# Altium PCB TK106_MIDI.PcbDoc
Units mm, origin at the board's own origin, x right, y up, seen from the top; angles counter-clockwise.
Board outline 60 x 100 mm, 2 copper layers (Top Layer, Bottom Layer); 18 components, 17 nets, 366 pads, 0 vias.
Unrouted connection lines stored in the file: 59.
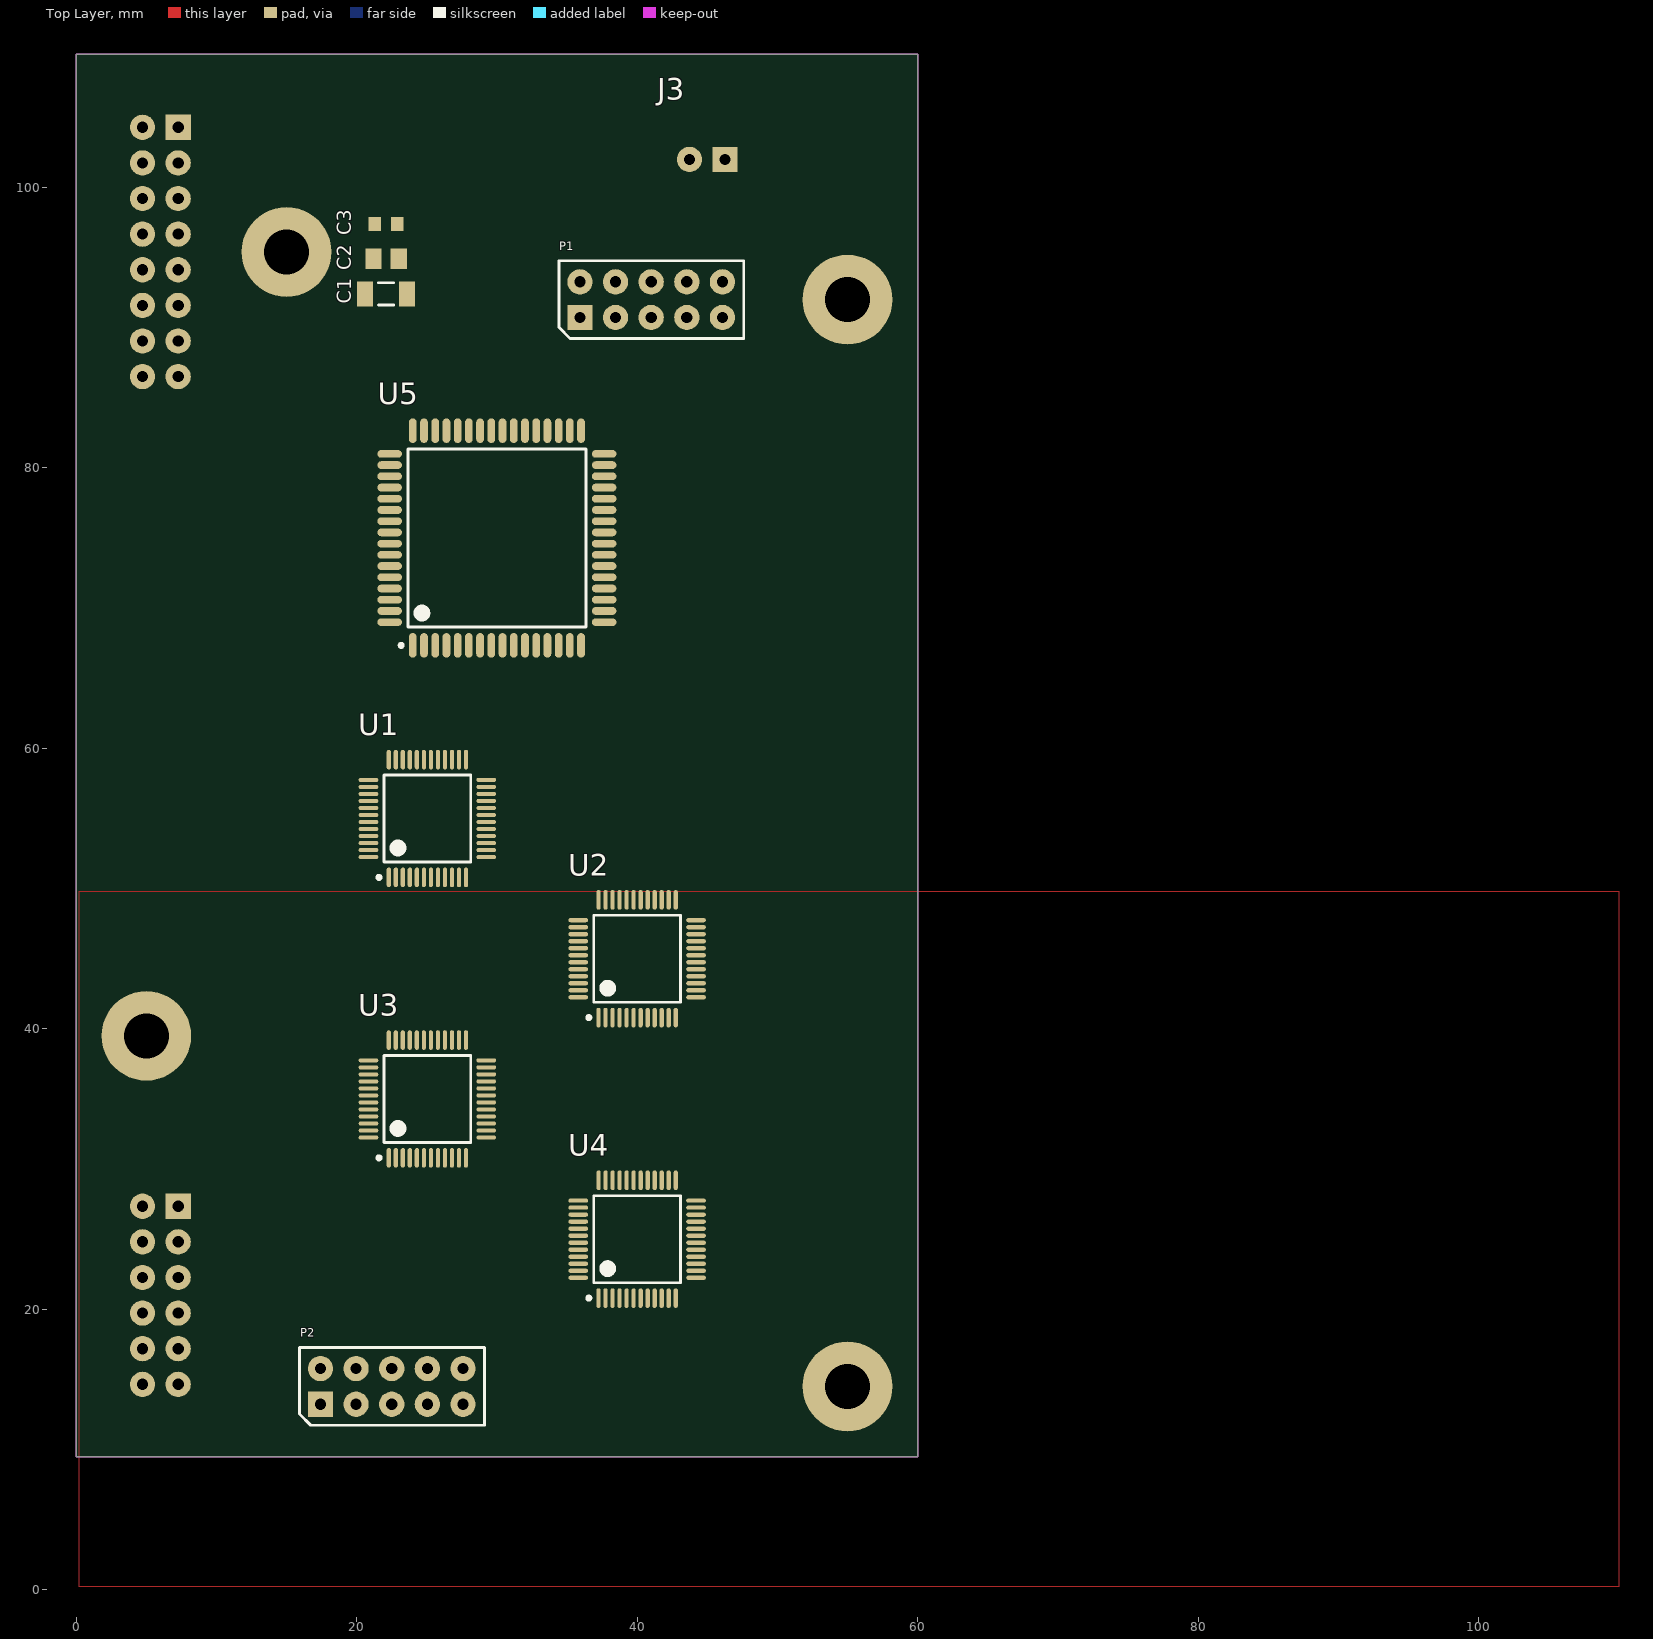
[diagram p0: Top Layer view]
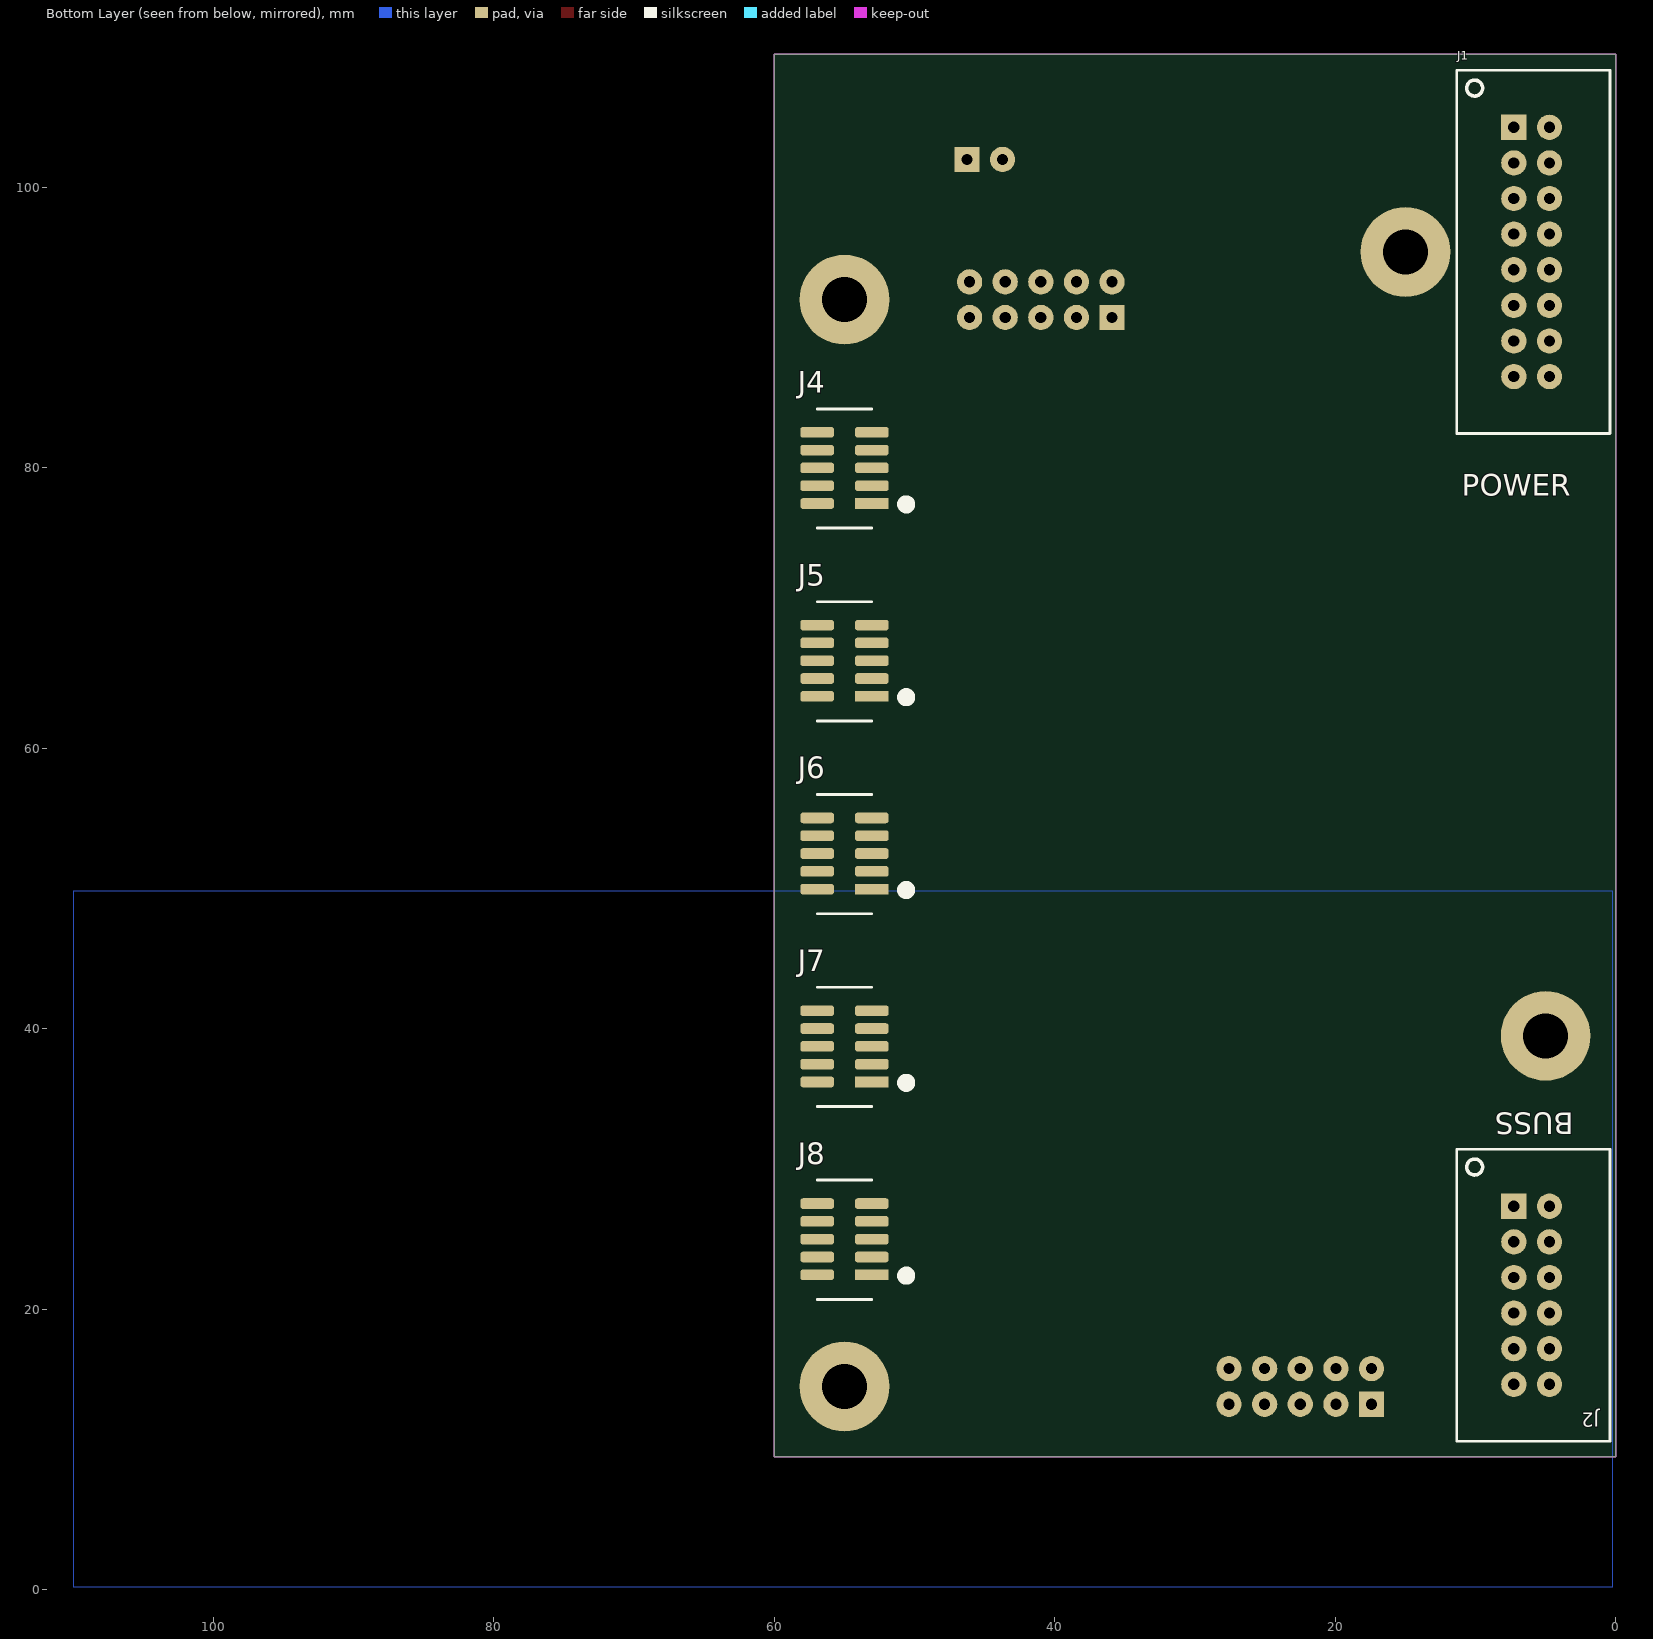
[diagram p1: Bottom Layer view, seen from below]

## Layer stack, top to bottom
Top Solder: solder mask 0.0102, Solder Resist, Dk 3.5
Top Layer: signal copper 0.0356
Dielectric 1: dielectric 0.32, FR-4, Dk 4.8
Bottom Layer: signal copper 0.0356
Bottom Solder: solder mask 0.0102, Solder Resist, Dk 3.5

## Board outline
0,9.5 0,109.5 60,109.5 60,9.5

## Design rules (kind name [scope] priority, off if disabled: settings)
Clearance [All] p1: gap=0.16 ignorepadtopadclearanceinfootprint=FALSE except(0: Arc-Text Arc-Hole Track-Text Track-Hole SMDPad-Text SMDPad-Hole THPad-Text THPad-Hole Via-Text Via-Hole Fill-Text Fill-Hole Poly-Text Poly-Hole Region-Text Region-Hole Text-Text Text-Hole)
Height [All] p1: minheight=0 maxheight=200 prefheight=12.7
HoleSize [All] p1: absolutevalues=TRUE maxlimit=6.35 minlimit=0.3 maxpercent=80.000 minpercent=20.000
MinimumSolderMaskSliver [All] p1: minsoldermaskwidth=0.1
PlaneClearance [All] p1: clearance=1
PlaneConnect [All] p1: planeconnectstyle=Relief reliefexpansion=0.508 reliefentries=4 reliefconductorwidth=1 reliefairgap=0.254
PolygonConnect PolygonConnect_1 [IsVia] p1: connectstyle=Direct reliefconductorwidth=0.254 reliefentries=4 polygonreliefangle="90 Angle" airgapwidth=0.254
PolygonConnect [All] p2: connectstyle=Relief reliefconductorwidth=0.2 reliefentries=4 polygonreliefangle="90 Angle" airgapwidth=0.2
RoutingVias [All] p1: holewidth=0.3 width=0.6 viastyle="Through Hole" minholewidth=0.3 minwidth=0.6 maxholewidth=6.35 maxwidth=10
SilkToSolderMaskClearance [IsPad] p1: minsilkscreentomaskgap=0.178 clearancetoexposedcopper=TRUE
SolderMaskExpansion [All] p1: expansion=0.1
Width [All] p1: maxlimit=10 minlimit=0.16 preferedwidth=0.4
24 further rules are at their usual default settings.

## Components (designator, comment, footprint, x,y, rotation, side; value= is the part's Value field where it differs from the comment)
C1 "4.7uF" CAPC1206(3216)170_N 22.1,92.407 r180 top
C2 "1uF" CAPC0805(2012)100_N 22.1,94.907 r180 top
C3 "100nF" CAPC0603(1608)55_N 22.1,97.407 r180 top
J1 "Header2x8" HDRV16W64P254_2X8_Shrouded 6,95.4 r180 bottom
J2 "Header2x6" HDRV12W64P254_2X6_Shrouded 6,21 r180 bottom
J3 "B2B-XH-A (LF)(SN)" JST_2P 45,102 r90 top
J4 "2x5_header_1,27mm" SMDHDRV10P127_2X5_615X330X560B 55,80 r0 bottom
J5 "2x5_header_1,27mm" SMDHDRV10P127_2X5_615X330X560B 55,66.25 r0 bottom
J6 "2x5_header_1,27mm" SMDHDRV10P127_2X5_615X330X560B 55,52.5 r0 bottom
J7 "2x5_header_1,27mm" SMDHDRV10P127_2X5_615X330X560B 55,38.75 r0 bottom
J8 "2x5_header_1,27mm" SMDHDRV10P127_2X5_615X330X560B 55,25 r0 bottom
P1 "Header2x5" HDRV10W64P254_2X5_Female 41,92 r90 top
P2 "Header2x5" HDRV10W64P254_2X5_Female 22.5,14.5 r90 top
U1 "ATmega4809" TQFP50P900X900X120-48N 25.04,55 r90 top
U2 "ATmega4809" TQFP50P900X900X120-48N 40,45 r90 top
U3 "ATmega4809" TQFP50P900X900X120-48N 25.04,35 r90 top
U4 "ATmega4809" TQFP50P900X900X120-48N 40,25 r90 top
U5 "ATXMEGA64A3U-AU" TQFP64 30,75 r90 top

## Footprints (in the part's own frame and the unit in brackets; to place one, negate y for a bottom-side part, rotate by r counter-clockwise, add the part's x,y. Pads: shape width x height; smd on the part's side, far side on the other; paste and mask are expansions set on the pad)
CAPC0603(1608)55_N [mm] "Chip Capacitor, Body 1.6x0.8mm, Height 0.55mm, IPC Medium Density"
  rect 0.9x1 smd: 1(-0.8,0) 2(0.8,0)
  body extent -0.87,-0.48 0.88,0.47, height 0.55
CAPC0805(2012)100_N [mm] "Chip Capacitor, Body 2.0x1.2mm, Height 1.0mm, IPC Medium Density"
  rect 1.15x1.45 smd: 1(-0.9,0) 2(0.9,0)
  body extent -1.1,-0.72 1.1,0.73, height 1
CAPC1206(3216)170_N [mm] "Chip Capacitor, Body 3.2x1.6mm, Height 1.7mm, IPC Medium Density"
  rect 1.15x1.8 smd: 1(-1.5,0) 2(1.5,0)
  silkscreen extent -0.55,-0.8 0.55,0.8, body extent -1.7,-0.9 1.7,0.9, height 1.7
HDRV10W64P254_2X5_Female [mm] "Header 2x5 Female"
  rect 1.8x1.8 hole 0.8: 1(-1.27,5.08)
  round 1.8 hole 0.8: 2(1.27,5.08) 3(-1.27,2.54) 4(1.27,2.54) 5(-1.27,0) 6(1.27,0) 7(-1.27,-2.54) 8(1.27,-2.54) 9(-1.27,-5.08) 10(1.27,-5.08)
  silkscreen extent -2.77,-6.6 2.77,6.58, body extent -2.48,-6.6 2.48,6.6, height 8.51
HDRV12W64P254_2X6_Shrouded [mm] "Header 2x6 Shrouded"
  rect 1.8x1.8 hole 0.8: 1(-1.27,6.35)
  round 1.8 hole 0.8: 2(1.27,6.35) 3(-1.27,3.81) 4(1.27,3.81) 5(-1.27,1.27) 6(1.27,1.27) 7(-1.27,-1.27) 8(1.27,-1.27) 9(-1.27,-3.81) 10(1.27,-3.81) 11(-1.27,-6.35) 12(1.27,-6.35)
  silkscreen extent -5.33,-10.41 5.59,10.41, body extent -4.45,-9.53 4.83,9.52, height 8.89
HDRV16W64P254_2X8_Shrouded [mm] "Header 2x8 Shrouded"
  rect 1.8x1.8 hole 0.8: 1(-1.27,8.89)
  round 1.8 hole 0.8: 2(1.27,8.89) 3(-1.27,6.35) 4(1.27,6.35) 5(-1.27,3.81) 6(1.27,3.81) 7(-1.27,1.27) 8(1.27,1.27) 9(-1.27,-1.27) 10(1.27,-1.27) 11(-1.27,-3.81) 12(1.27,-3.81) 13(-1.27,-6.35) 14(1.27,-6.35) 15(-1.27,-8.89) 16(1.27,-8.89)
  silkscreen extent -5.33,-12.95 5.59,12.95, body extent -4.45,-12.07 4.83,12.06, height 8.89
JST_2P [mm]
  rect 1.8x1.8 hole 0.8: 1(0,-1.27)
  round 1.8 hole 0.8: 2(0,1.27)
  body extent -2.4,-3.7 3.35,3.7, height 7
SMDHDRV10P127_2X5_615X330X560B [mm] "SMD 2X5 Vertical Header"
  rect 2.4x0.76 smd: 1(-1.95,2.54)
  rrect50% 2.4x0.76 smd: 2(1.95,2.54) 3(-1.95,1.27) 4(1.95,1.27) 5(-1.95,0) 6(1.95,0) 7(-1.95,-1.27) 8(1.95,-1.27) 9(-1.95,-2.54) 10(1.95,-2.54)
  silkscreen extent -4.54,-4.21 1.95,4.29, body extent -2.7,-3.18 2.8,3.17, height 4.5
TQFP50P900X900X120-48N [mm] "TSQFP, 48-Leads, Body 7,00x7,00mm, Pitch 0,50mm, IPC Medium Density"
  oval 1.4x0.3 smd: 1(-4.2,2.75) 2(-4.2,2.25) 3(-4.2,1.75) 4(-4.2,1.25) 5(-4.2,0.75) 6(-4.2,0.25) 7(-4.2,-0.25) 8(-4.2,-0.75) 9(-4.2,-1.25) 10(-4.2,-1.75) 11(-4.2,-2.25) 12(-4.2,-2.75) 25(4.2,-2.75) 26(4.2,-2.25) 27(4.2,-1.75) 28(4.2,-1.25) 29(4.2,-0.75) 30(4.2,-0.25) 31(4.2,0.25) 32(4.2,0.75) 33(4.2,1.25) 34(4.2,1.75) 35(4.2,2.25) 36(4.2,2.75)
  oval 0.3x1.4 smd: 13(-2.75,-4.2) 14(-2.25,-4.2) 15(-1.75,-4.2) 16(-1.25,-4.2) 17(-0.75,-4.2) 18(-0.25,-4.2) 19(0.25,-4.2) 20(0.75,-4.2) 21(1.25,-4.2) 22(1.75,-4.2) 23(2.25,-4.2) 24(2.75,-4.2) 37(2.75,4.2) 38(2.25,4.2) 39(1.75,4.2) 40(1.25,4.2) 41(0.75,4.2) 42(0.25,4.2) 43(-0.25,4.2) 44(-0.75,4.2) 45(-1.25,4.2) 46(-1.75,4.2) 47(-2.25,4.2) 48(-2.75,4.2)
  silkscreen extent -4.32,-3.1 3.1,3.57, body extent -4.51,-4.51 4.51,4.51, height 1.1
TQFP64 [mm] "Thin QFP, 64-Leads, Body 14x14mm, Pitch 0.8mm, IPC Medium Density"
  oval 1.75x0.55 smd: 1(-7.65,6) 2(-7.65,5.2) 3(-7.65,4.4) 4(-7.65,3.6) 5(-7.65,2.8) 6(-7.65,2) 7(-7.65,1.2) 8(-7.65,0.4) 9(-7.65,-0.4) 10(-7.65,-1.2) 11(-7.65,-2) 12(-7.65,-2.8) 13(-7.65,-3.6) 14(-7.65,-4.4) 15(-7.65,-5.2) 16(-7.65,-6) 33(7.65,-6) 34(7.65,-5.2) 35(7.65,-4.4) 36(7.65,-3.6) 37(7.65,-2.8) 38(7.65,-2) 39(7.65,-1.2) 40(7.65,-0.4) 41(7.65,0.4) 42(7.65,1.2) 43(7.65,2) 44(7.65,2.8) 45(7.65,3.6) 46(7.65,4.4) 47(7.65,5.2) 48(7.65,6)
  oval 0.55x1.75 smd: 17(-6,-7.65) 18(-5.2,-7.65) 19(-4.4,-7.65) 20(-3.6,-7.65) 21(-2.8,-7.65) 22(-2,-7.65) 23(-1.2,-7.65) 24(-0.4,-7.65) 25(0.4,-7.65) 26(1.2,-7.65) 27(2,-7.65) 28(2.8,-7.65) 29(3.6,-7.65) 30(4.4,-7.65) 31(5.2,-7.65) 32(6,-7.65) 49(6,7.65) 50(5.2,7.65) 51(4.4,7.65) 52(3.6,7.65) 53(2.8,7.65) 54(2,7.65) 55(1.2,7.65) 56(0.4,7.65) 57(-0.4,7.65) 58(-1.2,7.65) 59(-2,7.65) 60(-2.8,7.65) 61(-3.6,7.65) 62(-4.4,7.65) 63(-5.2,7.65) 64(-6,7.65)
  silkscreen extent -7.77,-6.35 6.35,6.95, body extent -7,-7 7,7, height 1.6

## Part data
C1: library part 2992, "X7R 50V", id=2992, navn=4.7uF, nokkelord="Kondensator, capacitor", pakke_opprettet="11.02.2015 13.21.22", pakke_opprettet_av=815, pakketype=1206, pris=1, produsent=Multikomp, symbol_opprettet="14.11.2014 20.19.34", symbol_opprettet_av=815
C2: library part 3582, "X7R 50V 10%", id=3582, leverandor=Farnell, leverandor_varenr=1735541, navn=1uF, nokkelord="Kondensator, capacitor", pakke_opprettet="14.11.2014 20.52.01", pakke_opprettet_av=815, pakketype=0805, pris=4, produsent=Murata, symbol_opprettet="14.11.2014 20.19.34", symbol_opprettet_av=815
C3: library part 3028, "X7R 50V 5%", id=3028, leverandor=Farnell, leverandor_varenr=1759122, navn=100nF, nokkelord="Kondensator, Capacitor, CAP", pakke_opprettet="18.02.2015 14.18.13", pakke_opprettet_av=815, pakketype=0603, pris=1, produsent=Multikomp, symbol_opprettet="14.11.2014 20.19.34", symbol_opprettet_av=815
J1: library part 4645, beskrivelse=Header, id=4645, navn="Header Shrouded 2X8P", nokkelord=Header, pakke_opprettet="2019-02-14 23:39:48", pakke_opprettet_av=815, pakketype=TH, pris=10, symbol_opprettet="2014-11-13 11:08:32", symbol_opprettet_av=815
J2: library part 4622, beskrivelse="Header Shrouded", id=4622, komponenttype=11, navn="Header 2X6 Shrouded", nokkelord=Header, pakke_opprettet="16/02/2019 14:00:24", pakke_opprettet_av=815, pakketype=TH, pris=16, symbol_opprettet="13/11/2014 11:04:02", symbol_opprettet_av=815
J3: library part 2227, antall=206, beskrivelse="JST 2pin (pris pr. stk.)", dybde=2, hylle=0, id=2227, kolonne=0, lager_type=Baklager, leverandor=Farnell, leverandor_varenr=1516276, navn="B2B-XH-A (LF)(SN)", nokkelord="Connector, Kontakt", pakke_opprettet="28.06.2014 18:25:03", pakke_opprettet_av=815, pakketype=TH, pris=2, produsent=JST, rad=1, rom=GM, symbol_opprettet="28.06.2014 15:33:17", symbol_opprettet_av=815
J4 J5 J6 J7 J8: library part 2449, antall=55, beskrivelse="1,27mm Pitch SMD Header", dybde=0, hylle=6, id=2449, kolonne=0, lager_type=Fremlager, navn="Header SMD 127 2x5", nokkelord=JTAG, pakke_opprettet="15.11.2014 18:30:38", pakke_opprettet_av=815, pakketype=SMD, pris=20, rad=4, rom=OV, symbol_opprettet="11.03.2019 22:06:02", symbol_opprettet_av=1366
P1 P2: library part 5661, beskrivelse=Header, id=5661, komponenttype=11, navn="Header 2X5 Female", nokkelord=Header, pakke_opprettet="31/01/2020 22:57:35", pakke_opprettet_av=815, pakketype=TH, pris=5, symbol_opprettet="13/11/2014 11:03:55", symbol_opprettet_av=815
U1 U2 U3 U4: library part 4733, beskrivelse="8-bit mikrokontroller", id=4733, navn=ATmega4809, nokkelord="AVR, atmel, microchip", pakke_opprettet="24.06.2019 20:42:06", pakke_opprettet_av=815, pakketype=TQFP, pris=0, produsent=Atmel, symbol_opprettet="24.06.2019 21:16:45", symbol_opprettet_av=815
U5: library part 2105, antall=900, beskrivelse=Mikrokontroller, dybde=1, hylle=0, id=2105, kolonne=0, lager_type=Baklager, navn=ATXMEGA64A3U-AU, pakke_opprettet="13.07.2014 19:45:53", pakke_opprettet_av=815, pakketype=TQFP, pris=0, produsent=Atmel, rad=44, rom=GM, symbol_opprettet="07.05.2015 23:14:48", symbol_opprettet_av=815

## Free pads (board coordinates)
  round 6.4 hole 3.2 unplated: 0(5,39.5) 0(15,95.4) 0(55,14.5) 0(55,92)

## Nets (pads, with @x,y where several pads share a name; then routed paths per layer and width w, separated by ;. In a path a pad name is that pad's centre, name@x,y a point inside that pad or via, vN(x,y) a via of type N, cw(c..) or ccw(c..) an arc to the next point about the centre after c; other vN are vias at no path point)
GND: C1.1 C2.1 C3.1 J1.9 J1.10 J1.11 J1.12 J1.13 J1.14 J2.1 J2.12 J5.2 J6.2 J7.2 J8.2 P1.7 P1.9 P2.9 pad.0@15,95.4 U1.15 U1.29 U1.43 U2.15 U2.29 U2.43 U3.15 U3.29 U3.43 U4.15 U4.29 U4.43
IN_0: J2.11
MIDI_CH1: J2.3
MIDI_CH2: J2.5
MIDI_CH3: J2.7
MIDI_CH4: J2.9
MISO: U1.1 U2.1 U3.1 U4.1 U5.22
MOSI: U1.48 U2.48 U3.48 U4.48 U5.21
NetJ5_3: J5.3 U1.41
NetJ6_3: J6.3 U2.41
NetJ7_3: J7.3 U3.41
NetJ8_3: J8.3 U4.41
SCK: U1.2 U2.2 U3.2 U4.2 U5.23
SS1: U1.3 U2.3 U3.3 U4.3
VCC_N12V: J1.15 J1.16
VCC_P5V0: C1.2 C2.2 C3.2 J1.5 J1.6 J5.4 J6.4 J7.4 J8.4 P1.8 P1.10 U1.14 U1.28 U1.42 U2.14 U2.28 U2.42 U3.14 U3.28 U3.42 U4.14 U4.28 U4.42
VCC_P12V: J1.7 J1.8
pads on no net: J1.1 J1.2 J1.3 J1.4 J2.2 J2.4 J2.6 J2.8 J2.10 J3.1 J3.2 J4.1 J4.2 J4.3 J4.4 J4.5 J4.6 J4.7 J4.8 J4.9 J4.10 J5.1 J5.5 J5.6 J5.7 J5.8 J5.9 J5.10 J6.1 J6.5 J6.6 J6.7 J6.8 J6.9 J6.10 J7.1 J7.5 J7.6 J7.7 J7.8 J7.9 J7.10 J8.1 J8.5 J8.6 J8.7 J8.8 J8.9 J8.10 P1.1 P1.2 P1.3 P1.4 P1.5 P1.6 P2.1 P2.2 P2.3 P2.4 P2.5 P2.6 P2.7 P2.8 P2.10 U1.4 U1.5 U1.6 U1.7 U1.8 U1.9 U1.10 U1.11 U1.12 U1.13 U1.16 U1.17 U1.18 U1.19 U1.20 U1.21 U1.22 U1.23 U1.24 U1.25 U1.26 U1.27 U1.30 U1.31 U1.32 U1.33 U1.34 U1.35 U1.36 U1.37 U1.38 U1.39 U1.40 U1.44 U1.45 U1.46 U1.47 U2.4 U2.5 U2.6 U2.7 U2.8 U2.9 U2.10 U2.11 U2.12 U2.13 U2.16 U2.17 U2.18 U2.19 U2.20 U2.21 U2.22 U2.23 U2.24 U2.25 U2.26 U2.27 U2.30 U2.31 U2.32 U2.33 U2.34 U2.35 U2.36 U2.37 U2.38 U2.39 U2.40 U2.44 U2.45 U2.46 U2.47 U3.4 U3.5 U3.6 U3.7 U3.8 U3.9 U3.10 U3.11 U3.12 U3.13 U3.16 U3.17 U3.18 U3.19 U3.20 U3.21 U3.22 U3.23 U3.24 U3.25 U3.26 U3.27 U3.30 U3.31 U3.32 U3.33 U3.34 U3.35 U3.36 U3.37 U3.38 U3.39 U3.40 U3.44 U3.45 U3.46 U3.47 U4.4 U4.5 U4.6 U4.7 U4.8 U4.9 U4.10 U4.11 U4.12 U4.13 U4.16 U4.17 U4.18 U4.19 U4.20 U4.21 U4.22 U4.23 U4.24 U4.25 U4.26 U4.27 U4.30 U4.31 U4.32 U4.33 U4.34 U4.35 U4.36 U4.37 U4.38 U4.39 U4.40 U4.44 U4.45 U4.46 U4.47 U5.1 U5.2 U5.3 U5.4 U5.5 U5.6 U5.7 U5.8 U5.9 U5.10 U5.11 U5.12 U5.13 U5.14 U5.15 U5.16 U5.17 U5.18 U5.19 U5.20 U5.24 U5.25 U5.26 U5.27 U5.28 U5.29 U5.30 U5.31 U5.32 U5.33 U5.34 U5.35 U5.36 U5.37 U5.38 U5.39 U5.40 U5.41 U5.42 U5.43 U5.44 U5.45 U5.46 U5.47 U5.48 U5.49 U5.50 U5.51 U5.52 U5.53 U5.54 U5.55 U5.56 U5.57 U5.58 U5.59 U5.60 U5.61 U5.62 U5.63 U5.64

## Polygon pours and split planes (outlines as drawn)
GND on Top Layer "GND" (solid, shelved, pour order 0): 0.2,0.2 0.2,49.8 110,49.8 110,0.2
GND on Bottom Layer "GND" (solid, shelved, pour order 2): 0.2,0.2 0.2,49.8 110,49.8 110,0.2

## Keep-outs
Keep-Out Layer:
  the board outline again, w0.1

## Silkscreen, mask and mechanical layers (free items; w line width, h text height)
Top Overlay:
  text "TK106 MIDI" at -22.1,34.5 h4
  text "Rev 1.0" at -20.5,31.9 h2.5
  text ".Print_Date" at -22.45,29.4 h2.5
  text "O" at -21,22.4 h8
  text "Teslakom" at -20.9,20.5 h2
  text "Omega Verksted" at -23.7,18.4 h2
Bottom Overlay:
  text "POWER" at 11,78 h1.52
  text "BUSS" at 3,34 h1.52 r180
  text "O" at -37,6.6 h10
  text "T" at -20.2,-0.8 h15
  text "TK106 MIDI" at -35.9,-2.4 h5
  text "Omega Verksted" at -50.7,-5.4 h2.5
  text "Teslakom" at -36.6,-5.4 h2.5
  text ".Print_Date" at -52.6,-8.4 h2.5
  text "Rev 1.0" at -36.7,-8.4 h2.5
  text "SN:" at -30.6,-17.9 h2
Mechanical 1:
  the board outline again, w0.1